# Altium PCB SensWear-V1R0-Haptic.PcbDoc
Units mm, origin at the board's own origin, x right, y up, seen from the top; angles counter-clockwise.
Board outline 16.6 x 8.5 mm, 4 copper layers (Top Layer, Layer 1, Layer 2, Bottom Layer), stack 0.148 mm thick; 9 components, 13 nets, 43 pads, 23 vias.
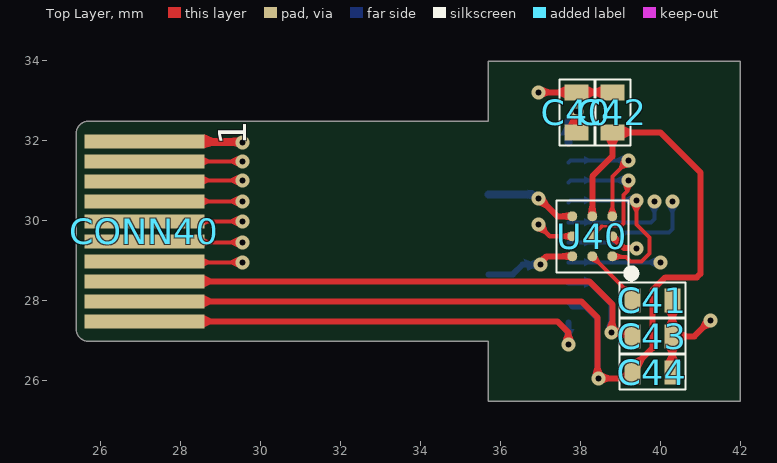
[diagram p0: Top Layer view]
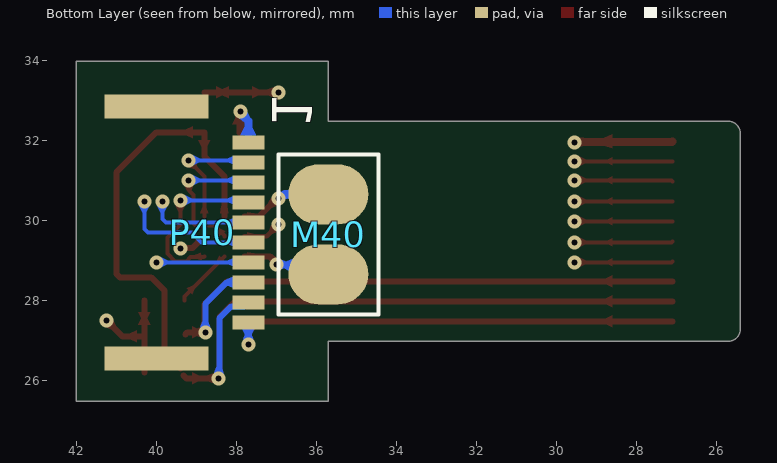
[diagram p1: Bottom Layer view, seen from below]
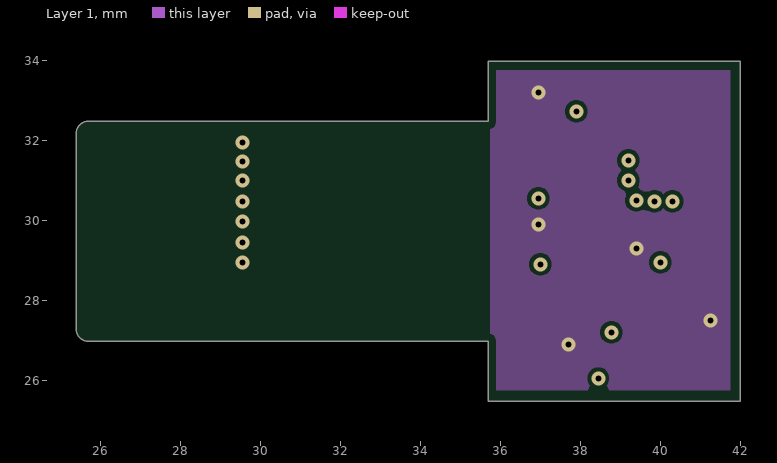
[diagram p2: Layer 1]
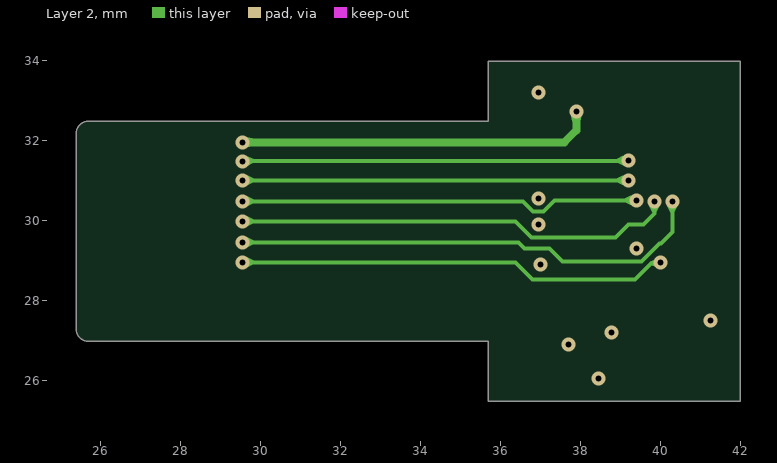
[diagram p3: Layer 2]
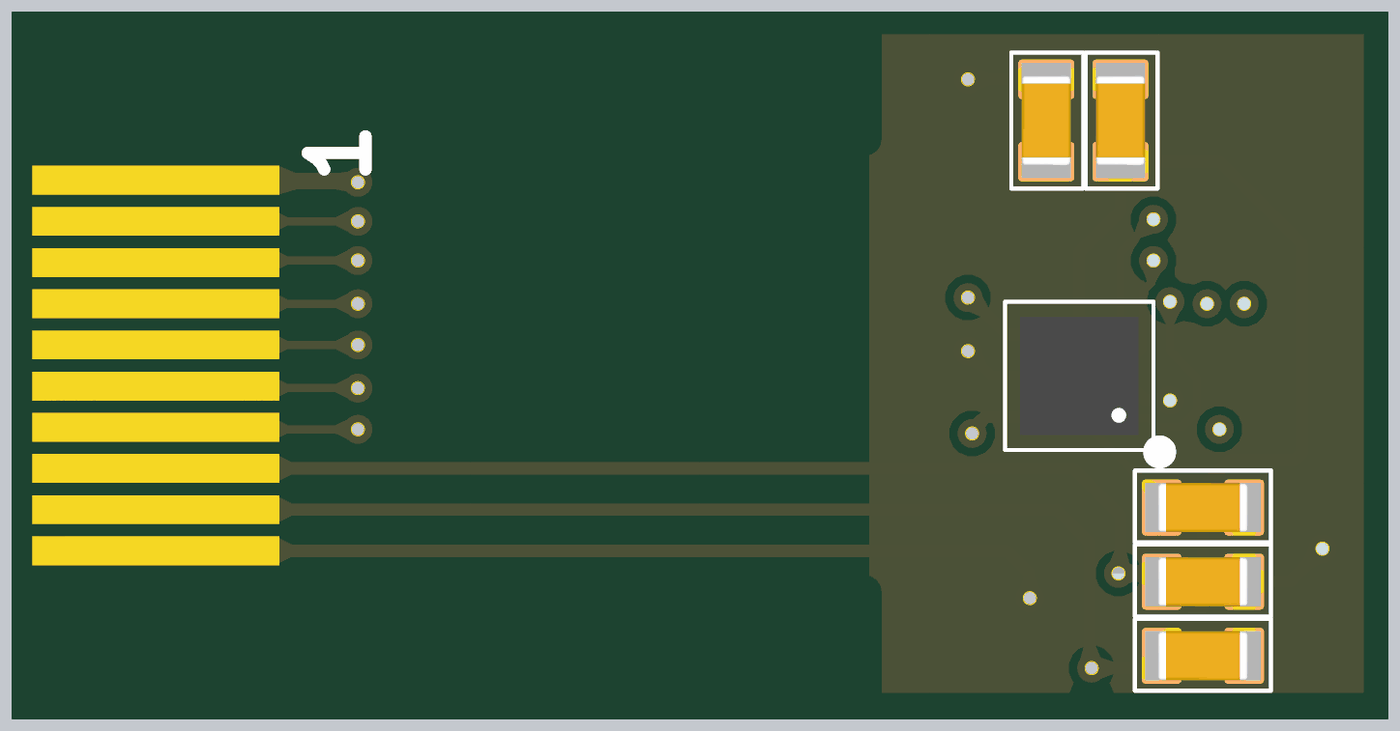
[diagram p4: 3D render of the assembled board from above, using the file's embedded part models]

## Layer stack, top to bottom
Top Solder: solder mask 0.0275, Solder Resist, Dk 2.9
Top Layer: signal copper 0.012
Dielectric 2: prepreg 0.0375, PP-006, Dk 3.3
Layer 1: signal copper 0.012
Dielectric 1: prepreg 0.025, FR-4, Dk 3.3
Layer 2: signal copper 0.012
Dielectric 3: prepreg 0.0375, PP-006, Dk 3.3
Bottom Layer: signal copper 0.012
Bottom Solder: solder mask 0.0275, Solder Resist, Dk 2.9

## Board outline
25.7,26.975 cw(c25.7,27.275) 25.4,27.275 25.4,32.175 cw(c25.7,32.175) 25.7,32.475 35.7,32.475 35.7,33.975 42,33.975 42,25.475 35.7,25.475 35.7,26.975

## Design rules (kind name [scope] priority, off if disabled: settings)
AcuteAngle [All] p1: minimum=7.50000000000000E+0001 checktracksonly=FALSE
BoardOutlineClearance [All] p1: gap=0.2 ignorepadtopadclearanceinfootprint=FALSE
Clearance Clearance_BGA [IsTrack vs IsBGA] p1: gap=0.2 ignorepadtopadclearanceinfootprint=FALSE
Clearance [All] p2: gap=0.1 ignorepadtopadclearanceinfootprint=FALSE
ComponentClearance [All] p1: gap=0.1 collisioncheckmode=3 verticalgap=0.1 showdistances=FALSE
MinimumSolderMaskSliver [All] p1: minsoldermaskwidth=0.12
PolygonConnect [All] p1: thpad.connectstyle=Relief thpad.reliefconductorwidth=0.254 thpad.reliefentries=4 thpad.polygonreliefangle="90 Angle" thpad.airgapwidth=0.254 smdpad.connectstyle=Relief smdpad.reliefconductorwidth=0.254 smdpad.reliefentries=4 smdpad.polygonreliefangle="90 Angle" smdpad.airgapwidth=0.254 via.connectstyle=Direct via.reliefconductorwidth=0.254 via.reliefentries=4 via.polygonreliefangle="90 Angle" via.airgapwidth=0.254
RoutingVias [All] p1: holewidth=0.15 width=0.35 viastyle="Through Hole" minholewidth=0.15 minwidth=0.35 maxholewidth=0.711 maxwidth=1.27
SilkToSilkClearance [All] p1: silktosilkclearance=0.1
SilkToSolderMaskClearance [IsPad] p1: minsilkscreentomaskgap=0.1 clearancetoexposedcopper=TRUE
SolderMaskExpansion [All] p1: expansion=0 istentingtop=FALSE
Width Width_50Ohm [IsTrack and HasParameter('Impedance') and HasParameterValue('Impedance', '50')] p1: maxlimit=0.254 minlimit=0.076 preferedwidth=0.254 toplayer_minwidth=0.254 midlayer1_maxwidth=0.076 midlayer1_prefwidth=0.076 midlayer2_maxwidth=0.076 midlayer2_prefwidth=0.076 bottomlayer_minwidth=0.254 minimp=50.000000 maximp=50.000000 favimp=50.000000 checkconnectedcopper=TRUE
Width [All] p2: maxlimit=1 minlimit=0.05 preferedwidth=0.1
26 further rules are at their usual default settings.

## Components (designator, comment, footprint, x,y, rotation, side; value= is the part's Value field where it differs from the comment)
C40 "4.7uF" CAPC1005X05N 37.9,32.7 r90 top
C41 "1 uF" CAPC1005X05N 39.8,28 r180 top
C42 "0.47 uF" CAPC1005X05N 38.8,32.7 r90 top
C43 "4.7uF" CAPC1005X05N 39.8,27.1 r180 top
C44 "4.7uF" CAPC1005X05N 39.8,26.2 r180 top
CONN40 "NC" 51281-1098-PCB 26.9,27.475 r0 top
M40 "G0832012" G0832012 35.7,29.65 r90 bottom
P40 "51281-1098" 51281-1098 40,29.7 r270 bottom
U40 "DRV2605LYZFR" BGA9C50P3X3_144X144X62 38.3,29.6 r180 top

## Footprints (in the part's own frame and the unit in brackets; to place one, negate y for a bottom-side part, rotate by r counter-clockwise, add the part's x,y. Pads: shape width x height; smd on the part's side, far side on the other; paste and mask are expansions set on the pad)
51281-1098 [mm]
  rect 0.6x2.6 smd: 0(-3.15,0) 0(3.15,0)
  rect 0.35x0.8 smd: 1(-2.25,2.3) 2(-1.75,2.3) 3(-1.25,2.3) 4(-0.75,2.3) 5(-0.25,2.3) 6(0.25,2.3) 7(0.75,2.3) 8(1.25,2.3) 9(1.75,2.3) 10(2.25,2.3)
  body extent -3.55,-1.48 3.55,2.57, height 1.17
51281-1098-PCB [mm]
  rect 3x0.35 smd paste-400 mask+0: 1(0.2,0) 2(0.2,0.5) 3(0.2,1) 4(0.2,1.5) 5(0.2,2) 6(0.2,2.5) 7(0.2,3) 8(0.2,3.5) 9(0.2,4) 10(0.2,4.5)
BGA9C50P3X3_144X144X62 [mm] "BGA, 9-Leads, Body 1.44x1.44mmx0.63mm, Pitch 0.50mm"
  round 0.25 smd paste+0 mask+0: A1(-0.5,0.5) A2(0,0.5) A3(0.5,0.5) B1(-0.5,0) B2(0,0) B3(0.5,0) C1(-0.5,-0.5) C2(0,-0.5) C3(0.5,-0.5)
  silkscreen extent -1.07,-0.9 0.9,1.02, body extent -0.72,-0.72 0.72,0.72, height 0.63
CAPC1005X05N [mm] "Chip Capacitor, 2-Leads, Body 1.00x0.50mm, IPC Medium Density"
  rect 0.4x0.6 smd mask+0.04: 1(-0.5,0) 2(0.5,0)
  silkscreen extent -0.82,-0.45 0.82,0.43, body extent -0.55,-0.3 0.55,0.3, height 0.6
G0832012 [mm]
  oval 1.5x2 smd mask+0.05: 1(-1,0) 2(1,0)
  silkscreen extent -2,-1.25 2,1.25, body extent -1.75,-1 1.75,1, height 1

## Part data
C40 C43 C44: library part GRM155R61A475MEAAD, "Multilayer Ceramic Capacitor, 4.7 uF, 10 V, ± 20%, X5R, 0402 [1005 Metric]", Case Code (Imperial)=0402, Case Code (Metric)=1005, Dielectric=1537DielectricType, Manufacturer=Murata, Max Operating Temperature=85°C, Min Operating Temperature=-55°C, Supplier Part Number 1=81-GRM155R61A475MEAD, Tolerance=20%, Voltage Rating=10V, Case/Package=0402, Category="Ceramic Capacitors", ComponentLink1Description=http://www.farnell.com/datasheets/2189109.pdf?src-supplier=Farnell, ComponentLink1URL=http://www.farnell.com/datasheets/2189109.pdf?src-supplier=Farnell, ComponentLink2Description=http://www.farnell.com/datasheets/2189109.pdf?src-supplier=Newark, ComponentLink2URL=http://www.farnell.com/datasheets/2189109.pdf?src-supplier=Newark, ComponentLink3Description=http://www.farnell.com/datasheets/2189109.pdf?src-supplier=Element14, ComponentLink3URL=http://www.farnell.com/datasheets/2189109.pdf?src-supplier=Element14, ComponentLink4Description=http://datasheet.octopart.com/GRM155R61A475MEAAD-Murata-datasheet-68589269.pdf?src-supplier=Distrelec, ComponentLink4URL=http://datasheet.octopart.com/GRM155R61A475MEAAD-Murata-datasheet-68589269.pdf?src-supplier=Distrelec, ComponentLink5Description=http://datasheet.octopart.com/GRM155R61A475MEAAD-Murata-datasheet-68589269.pdf?src-supplier=Farnell, ComponentLink5URL=http://datasheet.octopart.com/GRM155R61A475MEAAD-Murata-datasheet-68589269.pdf?src-supplier=Farnell, ComponentLink6Description=https://search.murata.co.jp/Ceramy/image/img/A01X/G101/ENG/GRM155R61A475MEAA-01.pdf?src-supplier=Digi-Key, ComponentLink6URL=https://search.murata.co.jp/Ceramy/image/img/A01X/G101/ENG/GRM155R61A475MEAA-01.pdf?src-supplier=Digi-Key, ComponentLink7Description=http://datasheet.octopart.com/GRM155R61A475MEAAD-Murata-datasheet-68589269.pdf?src-supplier=Future+Electronics, ComponentLink7URL=http://datasheet.octopart.com/GRM155R61A475MEAAD-Murata-datasheet-68589269.pdf?src-supplier=Future+Electronics, ComponentLink8Description=https://datasheet.octopart.com/GRM155R61A475MEAAD-Murata-datasheet-68589269.pdf?src-supplier=Newark, ComponentLink8URL=https://datasheet.octopart.com/GRM155R61A475MEAAD-Murata-datasheet-68589269.pdf?src-supplier=Newark, ComponentLink9Description=http://datasheet.octopart.com/GRM155R61A475MEAAD-Murata-datasheet-68589269.pdf?src-supplier=Verical, ComponentLink9URL=http://datasheet.octopart.com/GRM155R61A475MEAAD-Murata-datasheet-68589269.pdf?src-supplier=Verical, ComponentLink10Description=https://datasheet.octopart.com/GRM155R61A475MEAAD-Murata-datasheet-165579666.pdf?src-supplier=TME, ComponentLink10URL=https://datasheet.octopart.com/GRM155R61A475MEAAD-Murata-datasheet-165579666.pdf?src-supplier=TME, ComponentLink11Description=http://datasheet.octopart.com/GRM155R61A475MEAAD-Murata-datasheet-68589269.pdf?src-supplier=Quest, ComponentLink11URL=http://datasheet.octopart.com/GRM155R61A475MEAAD-Murata-datasheet-68589269.pdf?src-supplier=Quest, ComponentLink12Description=http://datasheet.octopart.com/GRM155R61A475MEAAD-Murata-datasheet-68589269.pdf?src-supplier=TTI, ComponentLink12URL=http://datasheet.octopart.com/GRM155R61A475MEAAD-Murata-datasheet-68589269.pdf?src-supplier=TTI, ComponentLink13Description=http://datasheet.octopart.com/GRM155R61A475MEAAD-Murata-datasheet-68589269.pdf?src-supplier=NAC+Semi, ComponentLink13URL=http://datasheet.octopart.com/GRM155R61A475MEAAD-Murata-datasheet-68589269.pdf?src-supplier=NAC+Semi, Height=650um, Length=1mm, Manufacturer Part Number=GRM155R61A475MEAAD, Material=4241ConductorMaterial, Mounting Technology="Surface Mount", Packaging="Tape and Reel", Pricing="10000=0,0187, 50000=0,0159, 100000=0,0132 (USD)", RoHS=Yes, RoHS Compliant=Yes, Series=GRM, Stock=930000, Supplier 1=Mouser, Supplier 2=Farnell, Supplier Part Number 2=3581674, Thickness=500um, Voltage Rating (DC)=10V, Width=500um
C41: library part GRM155R61A105KE15D, "CAP CER 1UF 10V X5R 0402", Capacitance=1µF, Manufacturer="Murata Electronics North America", Operating Temperature="-55°C ~ 85°C", Package / Case="0402 (1005 Metric)", Ratings=-, Supplier Part Number 1=490-3890-6-ND, Temperature Coefficient=X5R, Tolerance=±10%, Voltage - Rated=10V, Applications="General Purpose", Category=Capacitors, ComponentLink1Description=http://www.murata.com/~/media/webrenewal/support/library/catalog/products/capacitor/mlcc/c02e.ashx, ComponentLink1URL=http://www.murata.com/~/media/webrenewal/support/library/catalog/products/capacitor/mlcc/c02e.ashx, Features=-, Height - Seated (Max)=-, Lead Spacing=-, Lead Style=-, Manufacturer Part Number=GRM155R61A105KE15D, Mounting Type="Surface Mount, MLCC", Packaging=Digi-Reel®, Part Status=Active, Pricing 1="1=0.1, 10=0.024, 50=0.013, 100=0.011, 250=0.009, 500=0.0077, 1000=0.006, 5000=0.005 (USD)", RoHS="RoHS Compliant", Size / Dimension="0.039\" L x 0.020\" W (1.00mm x 0.50mm)", Stock 1=5520111, Supplier 1=Digi-Key, Thickness (Max)="0.022\" (0.55mm)"
C42: library part GRM155R61A474KE15D, "CAP CER 0.47UF 10V X5R 0402", Capacitance=0.47µF, Manufacturer="Murata Electronics North America", Operating Temperature="-55°C ~ 85°C", Package / Case="0402 (1005 Metric)", Ratings=-, Supplier Part Number 1=490-3264-6-ND, Temperature Coefficient=X5R, Tolerance=±10%, Voltage - Rated=10V, Applications="General Purpose", Category=Capacitors, ComponentLink1Description=http://www.murata.com/~/media/webrenewal/support/library/catalog/products/capacitor/mlcc/c02e.pdf, ComponentLink1URL=http://www.murata.com/~/media/webrenewal/support/library/catalog/products/capacitor/mlcc/c02e.pdf, Features=-, Height - Seated (Max)=-, Lead Spacing=-, Lead Style=-, Manufacturer Part Number=GRM155R61A474KE15D, Mounting Type="Surface Mount, MLCC", Packaging=Digi-Reel®, Part Status=Active, Pricing 1="1=0.08, 10=0.054, 50=0.029, 100=0.0246, 250=0.02008, 500=0.01718, 1000=0.01339, 5000=0.01116 (GBP)", RoHS="RoHS Compliant", Size / Dimension="0.039\" L x 0.020\" W (1.00mm x 0.50mm)", Stock 1=715573, Supplier 1=Digi-Key, Thickness (Max)="0.022\" (0.55mm)"
CONN40: library part 51281-1098-PCB, System=Connector
M40: "VIBRATION MOTOR 1.8V", Manufacturer="Jinlong Machinery & Electronics, Inc.", Operating Temperature="-20°C ~ 60°C", Power - Rated=-, Supplier Part Number 1=1670-1034-ND, Voltage - Rated=1.8VAC, Approvals=-, Category="Motors, Solenoids, Driver Boards/Modules", ComponentLink1Description=http://www.vibration-motor.com/products/download/G0832012.pdf, ComponentLink1URL=http://www.vibration-motor.com/products/download/G0832012.pdf, Diameter - Shaft=-, Encoder Type=-, Features=-, Function="Vibration, LRA", Gear Reduction Ratio=-, Length - Shaft and Bearing=-, Manufacturer Part Number=G0832012, Motor Type=-, Mounting Hole Spacing=-, Part Status=Active, Pricing="1=3.17, 5=3.002, 10=2.918, 25=2.8348, 50=2.5846, 100=2.3345, 250=2.25112, 500=2.21778, 1000=2.08438 (USD)", RoHS="RoHS Compliant", RPM=-, Size / Dimension="Round - 0.315\" Dia (8.00mm)", Stock=810, Supplier 1=Digi-Key, Termination Style="Wire Leads", Torque - Max Momentary (oz-in / mNm)=-, Torque - Rated (oz-in / mNm)=-, Type="AC Motor", Weight=-
P40: "FFC/FPC Connector, Surface Mount, Right-Angle, Non-ZIF, Dual Contact Style", Manufacturer=Molex, Supplier Part Number=900-0512811098CT-ND, Supplier Part Number 1=538-51281-1098, ComponentLink1Description=https://datasheet.octopart.com/51281-1098-Molex-datasheet-165827616.pdf?src-supplier=Farnell, ComponentLink1URL=https://datasheet.octopart.com/51281-1098-Molex-datasheet-165827616.pdf?src-supplier=Farnell, Manufacturer Part Number=51281-1098, Pricing="1=0.7, 10=0.594, 25=0.5568, 50=0.53, 100=0.5047, 250=0.47304, 500=0.45042, 1000=0.42891 (USD)", RoHS=No, Stock=2876, Supplier=Digikey, Supplier 1=Mouser, Supplier 2=Digikey, Supplier 3=Digikey, Supplier Part Number 2=900-0512811098CT-ND, Supplier Part Number 3=900-0512811098DKR-ND, System=Connector
U40: "Haptic driver for ERM/LRA with 2-V operation, waveform library & auto-resonance tracking 9-DSBGA -40 to 85", Manufacturer="Texas Instruments", Supplier Part Number=595-DRV2605LYZFR, Category="Integrated Circuits (ICs)", ComponentLink1Description=http://www.ti.com/general/docs/suppproductinfo.tsp?distId=10&amp;gotoUrl=http%3A%2F%2Fwww.ti.com%2Flit%2Fgpn%2Fdrv2605l&src-supplier=Digi-Key, ComponentLink1URL=http://www.ti.com/general/docs/suppproductinfo.tsp?distId=10&amp;gotoUrl=http%3A%2F%2Fwww.ti.com%2Flit%2Fgpn%2Fdrv2605l&src-supplier=Digi-Key, ComponentLink2Description=http://www.ti.com/lit/pdf/ssiy004?src-supplier=Digi-Key, ComponentLink2URL=http://www.ti.com/lit/pdf/ssiy004?src-supplier=Digi-Key, ComponentLink3Description=http://www.ti.com/general/docs/lit/getliterature.tsp?genericPartNumber=DRV2605L&&fileType=pdf&src-supplier=Avnet, ComponentLink3URL=http://www.ti.com/general/docs/lit/getliterature.tsp?genericPartNumber=DRV2605L&&fileType=pdf&src-supplier=Avnet, Manufacturer Part Number=DRV2605LYZFR, Pricing="1=1,93, 10=1,74, 50=1,74, 100=1,4, 1000=0,955, 10000=0,845 (USD)", RoHS=Yes, Stock=2778, Supplier=Mouser, Supplier 1=Mouser, Supplier Part Number 1=595-DRV2605LYZFR

## Via types
v1: diameter 0.35, hole 0.15, Top Layer to Bottom Layer, tented both sides, 23 vias

## Nets (pads, with @x,y where several pads share a name; then routed paths per layer and width w, separated by ;. In a path a pad name is that pad's centre, name@x,y a point inside that pad or via, vN(x,y) a via of type N, cw(c..) or ccw(c..) an arc to the next point about the centre after c; other vN are vias at no path point)
1V8: C43.2 CONN40.3 P40.8 | length 15.1
  Top Layer w0.15: CONN40.3 38.225,28.475 38.8,27.9 38.8,27.2 39.225,27.2 C43.2@39.275,27.15
  Bottom Layer w0.15: P40.8 38.235,28.45 38.775,27.91 v1(38.775,27.2)
GND: C40.2 C41.1 C42.2 C43.1 C44.1 CONN40.1 P40.10 U40.B1 U40.B3 | length 18
  Top Layer w0.12: v1(36.95,29.9) 36.95,29.887 37.237,29.6 U40.B3
  Top Layer w0.15: CONN40.1 37.425,27.475 37.7,27.2 v1(37.7,26.9) ; v1(36.95,33.2) C42.2 ; U40.B1 39.09,29.31 39.39,29.31 v1(39.4,29.3) ; C44.1 C41.1 ; C43.1 40.85,27.1 v1(41.25,27.5)
  Bottom Layer w0.15: v1(37.7,26.9) P40.10
GPIO_0: CONN40.7 P40.4 U40.A1 | length 16.8
  Top Layer w0.1: CONN40.7 v1(29.55,30.475) ; U40.A1 38.815,29.085 39.14,29.085 39.25,28.975 39.535,28.975 39.725,29.165 39.725,29.575 39.4,29.9 v1(39.4,30.5)
  Layer 2 w0.1: v1(29.55,30.475) 36.565,30.475 36.815,30.225 37.085,30.225 37.36,30.5 v1(39.4,30.5)
  Bottom Layer w0.1: P40.4 37.75,30.5 v1(39.4,30.5)
GPIO_1: CONN40.6 P40.5 | length 16.1
  Top Layer w0.1: CONN40.6 v1(29.55,29.975)
  Layer 2 w0.1: v1(29.55,29.975) 36.375,29.975 36.775,29.575 38.875,29.575 39.2,29.9 39.575,29.9 39.85,30.175 v1(39.85,30.475)
  Bottom Layer w0.1: P40.5 39.762,29.95 39.85,30.038 v1(39.85,30.475)
GPIO_2: CONN40.5 P40.6 | length 17.9
  Top Layer w0.1: CONN40.5 27.125,29.45 v1(29.55,29.45)
  Layer 2 w0.1: v1(29.55,29.45) 36.45,29.45 36.6,29.3 37.235,29.3 37.56,28.975 39.535,28.975 39.985,29.425 40.015,29.425 40.3,29.71 v1(40.3,30.475)
  Bottom Layer w0.1: P40.6 38.875,29.45 39.125,29.7 40.212,29.7 40.3,29.788 v1(40.3,30.475)
GPIO_3: CONN40.4 P40.7 | length 15.6
  Top Layer w0.1: CONN40.4 27.125,28.95 v1(29.55,28.95)
  Layer 2 w0.1: v1(29.55,28.95) 36.375,28.95 36.8,28.525 39.367,28.525 39.766,28.924 39.974,28.924 v1(40,28.95)
  Bottom Layer w0.1: P40.7 v1(40,28.95)
NetC41_2: C41.2 U40.A2 | length 1.5
  Top Layer w0.1: U40.A2 39.15,28.25 39.3,28.1 C41.2
NetM40_1: M40.1 U40.A3 | length 2.3
  Top Layer w0.15: v1@36.95,28.95 37.004,28.95 37.154,29.1 U40.A3
  Bottom Layer w0.15: M40.1 36.315,28.65 36.554,28.889 36.989,28.889 v1(37,28.9)
NetM40_2: M40.2 U40.C3 | length 2.3
  Top Layer w0.15: v1@36.962,30.563 37.425,30.1 U40.C3
  Bottom Layer w0.2: M40.2 36.809,30.65 36.909,30.55 v1(36.95,30.55)
SCL: CONN40.9 P40.2 U40.C1 | length 15.2
  Top Layer w0.1: CONN40.9 v1(29.55,31.475) ; U40.C1 38.8,31.1 v1(39.2,31.5)
  Layer 2 w0.1: v1(29.55,31.475) 29.562,31.487 39.187,31.487 v1(39.2,31.5)
  Bottom Layer w0.1: P40.2 37.75,31.5 v1(39.2,31.5)
SDA: CONN40.8 P40.3 U40.B2 | length 15.7
  Top Layer w0.05: 38.525,29.85 39,29.85
  Top Layer w0.1: CONN40.8 27.125,31 v1(29.55,31) ; U40.B2 38.3,29.625 38.525,29.85 ; 39,29.85 39.075,29.925 39.075,30.635 39.175,30.735 39.175,30.975 v1(39.2,31)
  Layer 2 w0.1: v1(29.55,31) v1(39.2,31)
  Bottom Layer w0.1: P40.3 37.75,31 v1(39.2,31)
V_REG_IO: C42.1 C44.2 CONN40.2 P40.9 U40.C2 | length 27.2
  Top Layer w0.15: CONN40.2 38.025,27.975 38.425,27.575 38.425,26.125 v1@38.4,26.1 ; U40.C2 38.3,31.1 38.8,31.6 C42.1 40,32.2 41,31.2 41,28.663 40.912,28.575 40.128,28.575 39.8,28.247 39.8,26.8 39.4,26.4 C44.2@39.4,26.3 ; v1(38.45,26.05) 39.25,26.05 C44.2@39.325,26.125
  Bottom Layer w0.12: P40.9 P40.9@37.795,27.855
  Bottom Layer w0.15: P40.9@37.795,27.855 37.8,27.85 38.122,27.85 38.425,27.547 v1@38.425,26.075
V_SYS: C40.1 CONN40.10 P40.1 | length 12.8
  Top Layer w0.2: CONN40.10 27.113,31.962 29.537,31.962 v1(29.55,31.95) ; C40.1 v1(37.9,32.725)
  Layer 2 w0.2: v1(29.55,31.95) 37.6,31.95 37.9,32.25 v1(37.9,32.725)
  Bottom Layer w0.2: P40.1 37.7,32.484 37.9,32.684 v1(37.9,32.725)
pads on no net: P40.0

## Polygon pours and split planes (outlines as drawn)
GND on Layer 1 "GND_L02_P000" (solid, remove dead copper, pour order 0): 35.75,33.75 41.75,33.75 41.75,25.75 35.75,25.75

## Silkscreen, mask and mechanical layers (free items; w line width, h text height)
Bottom Overlay:
  text "1" at 37.1,32.3 h1 r90
Board:
  the board outline again, w0.1
Top Assembly:
  lines w0.1: 25.4,24.3 25.4,34.3 ; 30.2,24.55 30.2,33.875 ; 35.7,24.3 35.7,34.1

## Dimensions
25.4,34.3 to 42,33.975 on Fab Notes
25.4,24.3 to 30.2,24.55 on Fab Notes
35.7,24.3 to 42,25.475 on Fab Notes
30.2,33.875 to 35.7,34.1 on Fab Notes
42,25.475 to 42,33.975 on Fab Notes

## Text inside footprints (layer, text, board x,y; h text height)
CONN40: Fab Notes "Stiffner" at 26.15,25.975 h0.7; Top Overlay "1" at 29.65,31.875 h0.7 r90